# Altium PCB PCB1.PcbDoc
Units mm, origin at the board's own origin, x right, y up, seen from the top; angles counter-clockwise.
Board outline 29.34 x 38.73 mm, 2 copper layers (Top Layer, Bottom Layer); 15 components, 0 nets, 47 pads, 0 vias.
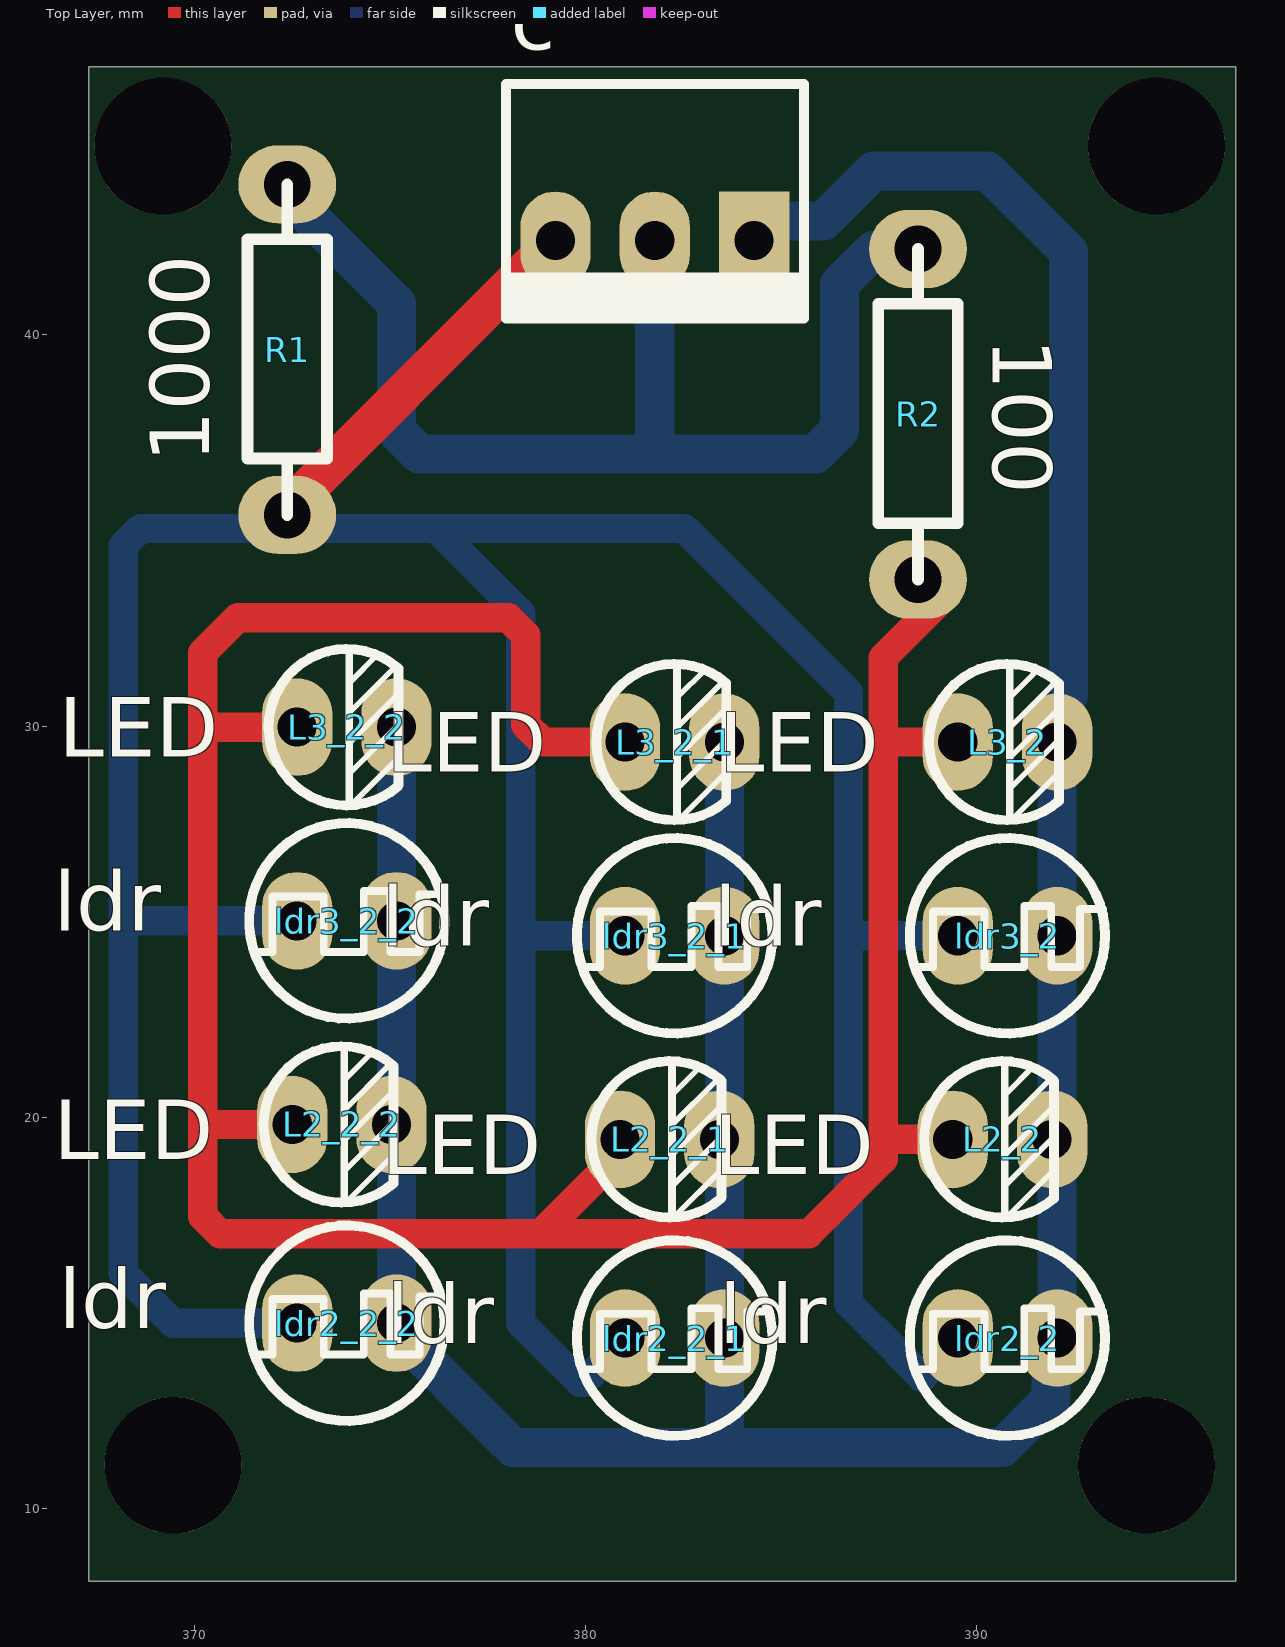
[diagram p0: Top Layer view]
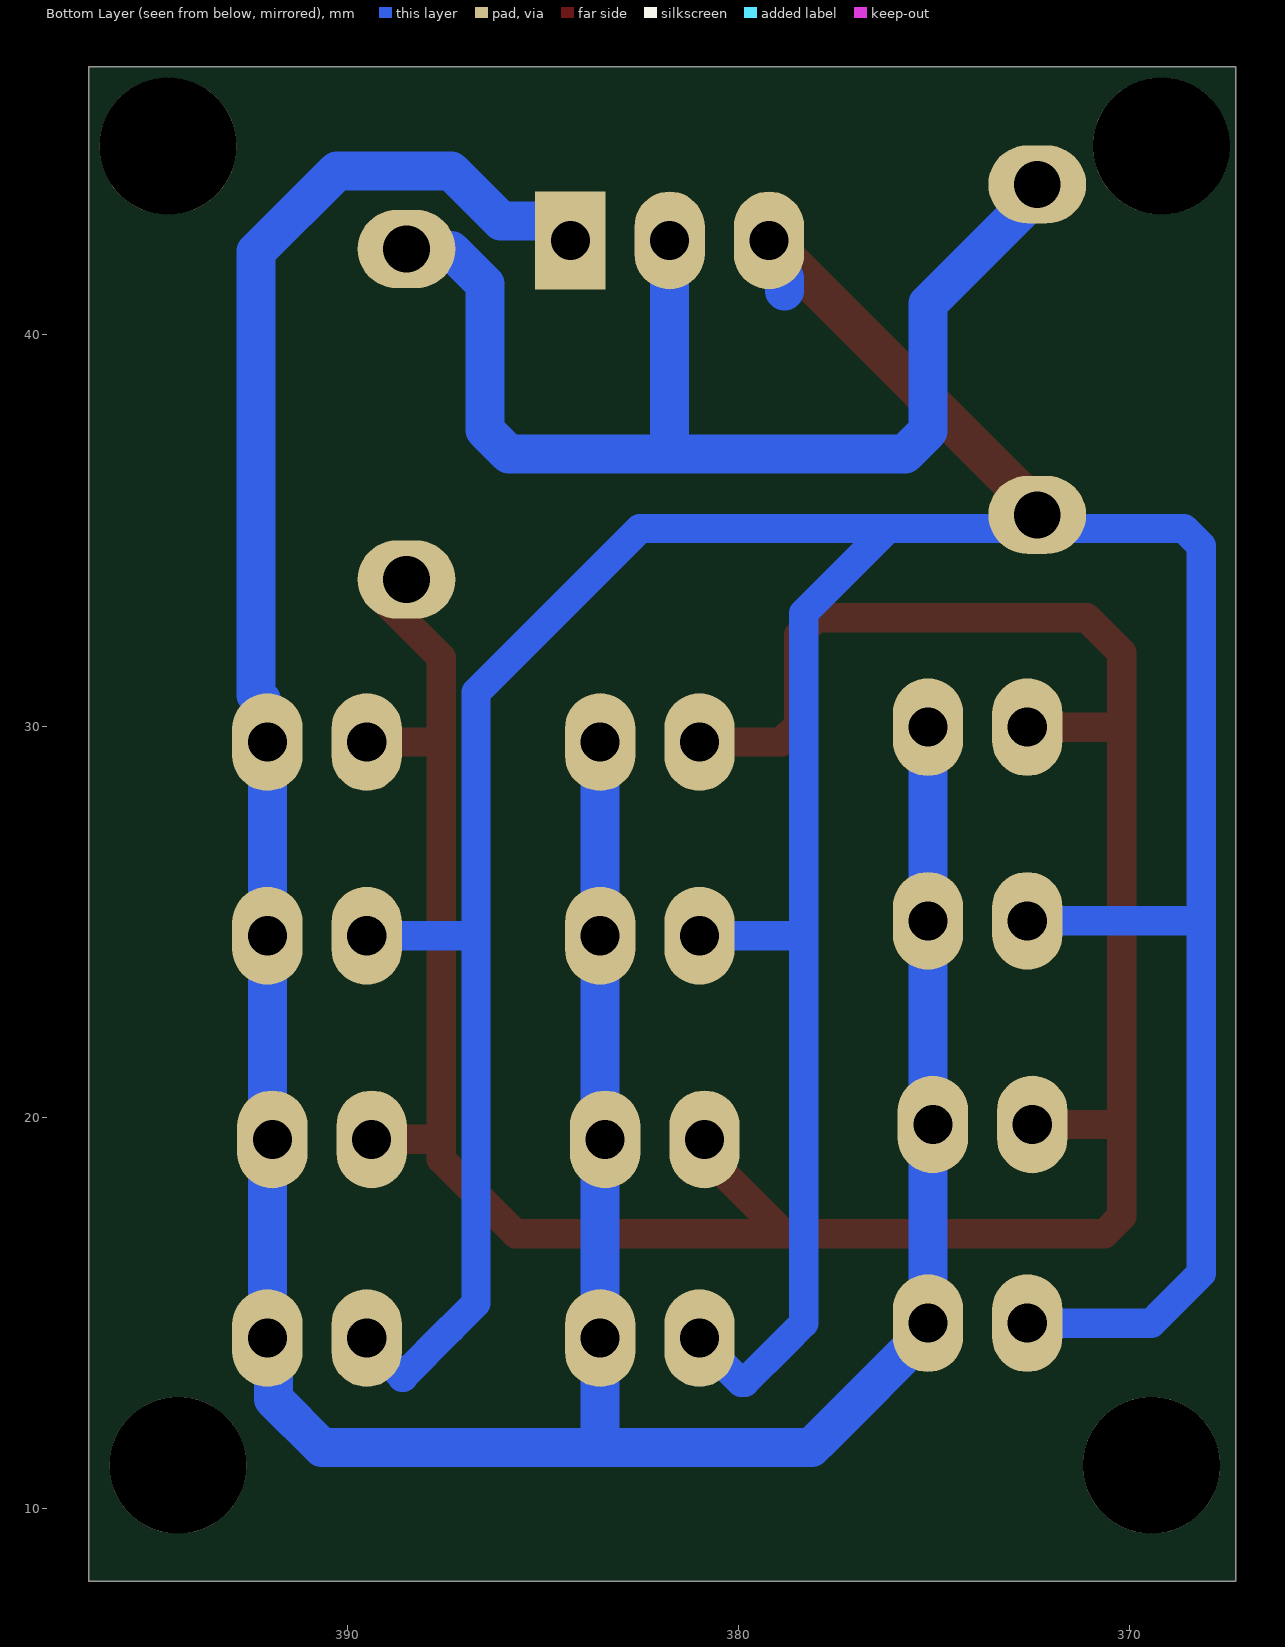
[diagram p1: Bottom Layer view, seen from below]

## Layer stack, top to bottom
Top Solder: solder mask 0.0102, Solder Resist, Dk 3.5
Top Layer: signal copper 0.0356
Dielectric 1: dielectric 0.32, FR-4, Dk 4.8
Bottom Layer: signal copper 0.0356
Bottom Solder: solder mask 0.0102, Solder Resist, Dk 3.5

## Board outline
367.284,8.128 367.284,46.863 396.621,46.863 396.621,8.128

## Design rules (kind name [scope] priority, off if disabled: settings)
Clearance [All] p1: gap=0.254 ignorepadtopadclearanceinfootprint=FALSE
PolygonConnect [All] p1: connectstyle=Relief reliefconductorwidth=0.254 reliefentries=4 polygonreliefangle="90 Angle" airgapwidth=0.254
RoutingVias [All] p1: holewidth=0.711 width=1.27 viastyle="Through Hole" minholewidth=0.711 minwidth=1.27 maxholewidth=0.711 maxwidth=1.27
SolderMaskExpansion [All] p1: expansion=0.102 istentingtop=FALSE
Width [All] p1: maxlimit=1 minlimit=0.75 preferedwidth=0.75
30 further rules are at their usual default settings.

## Components (designator, comment, footprint, x,y, rotation, side; value= is the part's Value field where it differs from the comment)
c "Header 3" mokhaberati3 384.302,42.418 r180 top (schematic designator H1)
L2_2 "LED" LED_3 390.652,19.431 r0 top (schematic designator L2)
L2_2_1 "LED" LED_3 382.143,19.431 r0 top (schematic designator L2)
L2_2_2 "LED" LED_3 373.761,19.812 r0 top (schematic designator L2)
L3_2 "LED" LED_3 390.779,29.591 r0 top (schematic designator L3)
L3_2_1 "LED" LED_3 382.27,29.591 r0 top (schematic designator L3)
L3_2_2 "LED" LED_3 373.888,29.972 r0 top (schematic designator L3)
ldr2_2 "ldr" ldr_1 390.779,14.351 r180 top (schematic designator ldr2)
ldr2_2_1 "ldr" ldr_1 382.27,14.351 r180 top (schematic designator ldr2)
ldr2_2_2 "ldr" ldr_1 373.888,14.732 r180 top (schematic designator ldr2)
ldr3_2 "ldr" ldr_1 390.779,24.638 r180 top (schematic designator ldr3)
ldr3_2_1 "ldr" ldr_1 382.27,24.638 r180 top (schematic designator ldr3)
ldr3_2_2 "ldr" ldr_1 373.888,25.019 r180 top (schematic designator ldr3)
R1 "1000" res_1 372.364,39.624 r90 top
R2 "100" res_1 388.493,37.973 r90 top

## Footprints (in the part's own frame and the unit in brackets; to place one, negate y for a bottom-side part, rotate by r counter-clockwise, add the part's x,y. Pads: shape width x height; smd on the part's side, far side on the other; paste and mask are expansions set on the pad)
ldr_1 [mm]
  oval 1.8x2.5 hole 1 paste-2539.97 mask+0.102: 1(-1.27,0) 2(1.27,0)
  round 0.2 on Top Overlay: 2(0,0)
  silkscreen extent -2.5,-2.5 2.5,2.5
LED_3 [mm] "www.Pishnam.com"
  oval 1.8x2.5 hole 1: 1(-1.27,0) 2(1.27,0)
  round 0.3 on Top Overlay: 1(0,0)
  silkscreen extent -2,-2.01 1.38,2, body extent -1.88,-1.83 1.84,2.17, height 5.08
mokhaberati3 [mm]
  rect 1.8x2.5 hole 1: gnd(0,0)
  oval 1.8x2.5 hole 1: out(5.08,0) vcc(2.54,0)
  silkscreen extent -1.27,-4 6.35,2, body extent -1.27,-4 6.35,2, height 11
res_1 [mm] "www.Pishnam.com"
  oval 2x2.5 hole 1.2: 1(-4.225,0) 2(4.225,0)
  silkscreen extent -4.22,-1.02 4.23,1.02, body extent -4.54,-0.96 4.42,0.88, height 1.92

## Part data
c: "Header, 3-Pin", طراحی توسط="مهندس محمد رفیعی", وب سایت=www.Pishnam.com, کانال تلگرام=@Pishnam
R1 R2: library part Resistor, "Resistor", طراحی توسط="مهندس محمد رفیعی", وب سایت=www.Pishnam.com, کانال تلگرام=@Pishnam
L2_2 L2_2_1 L2_2_2 L3_2 L3_2_1 L3_2_2 ldr2_2 ldr2_2_1 ldr2_2_2 ldr3_2 ldr3_2_1 ldr3_2_2: طراحی توسط="مهندس محمد رفیعی", وب سایت=www.Pishnam.com, کانال تلگرام=@Pishnam

## Free pads (board coordinates)
  round 3.5 hole 3.5: 6(369.189,44.831) 6(369.443,11.099) 6(394.335,11.099) 6(394.589,44.831)

## Nets (pads, with @x,y where several pads share a name; then routed paths per layer and width w, separated by ;. In a path a pad name is that pad's centre, name@x,y a point inside that pad or via, vN(x,y) a via of type N, cw(c..) or ccw(c..) an arc to the next point about the centre after c; other vN are vias at no path point)
pads on no net: c.gnd c.out c.vcc L2_2.1 L2_2.2 L2_2_1.1 L2_2_1.2 L2_2_2.1 L2_2_2.2 L3_2.1 L3_2.2 L3_2_1.1 L3_2_1.2 L3_2_2.1 L3_2_2.2 ldr2_2.1 ldr2_2.2 ldr2_2_1.1 ldr2_2_1.2 ldr2_2_2.1 ldr2_2_2.2 ldr3_2.1 ldr3_2.2 ldr3_2_1.1 ldr3_2_1.2 ldr3_2_2.1 ldr3_2_2.2 R1.1 R1.2 R2.1 R2.2
copper on no net: | length 309.6
  Top Layer w0.75: 370.205,19.812 372.491,19.812 ; 370.244,29.972 372.618,29.972 ; 378.911,17.088 380.873,19.05 380.873,19.431 ; 381.261,29.591 378.899,29.591 378.46,30.03 378.46,32.327 378.021,32.766 371.094,32.766 370.205,31.877 370.205,29.972 370.205,17.457 370.644,17.018 378.911,17.018 385.699,17.018 387.604,18.923 387.604,19.431 ; 387.731,29.591 389.509,29.591 ; 389.173,33.319 387.604,31.75 387.604,29.591 387.604,19.431 ; 389.382,19.431 387.604,19.431
  Top Layer w1: 372.035,35.231 378.719,41.915 378.852,41.915 379.222,42.284 379.222,42.418 ; 381.762,42.164 381.762,42.418
  Bottom Layer w0.75: 372.618,14.732 369.761,14.732 369.443,14.732 368.173,16.002 368.173,25.019 ; 372.618,25.019 368.173,25.019 ; 381,14.351 381,14.285 379.935,13.22 379.845,13.22 378.841,14.224 378.333,14.732 378.333,24.638 ; 381,24.638 378.333,24.638 ; 387.35,14.605 388.608,13.347 388.571,13.347 389.509,14.285 389.509,14.351 ; 387.604,14.351 386.715,15.24 386.715,24.638 ; 389.509,24.638 386.715,24.638 ; 368.173,25.019 368.173,34.613 368.612,35.052 371.504,35.052 376.174,35.052 ; 376.174,35.052 382.524,35.052 386.715,30.861 386.715,24.638 ; 376.174,35.052 378.333,32.893 378.333,24.638
  Bottom Layer w1: 371.887,44.072 375.158,40.801 375.158,37.543 375.744,36.957 381.762,36.957 ; 375.09,14.6 377.879,11.811 378.133,11.557 383.54,11.557 383.54,14.351 ; 375.158,14.532 375.158,19.812 375.158,25.019 375.158,29.972 ; 375.285,30.422 375.285,30.51 ; 378.822,41.129 378.822,41.452 379.222,41.852 379.222,42.418 ; 381.635,11.557 390.657,11.557 391.896,12.796 391.896,14.198 392.049,14.351 ; 381.762,42.418 381.762,36.957 ; 383.54,14.217 383.54,14.351 ; 383.54,30.129 383.54,29.591 383.54,24.638 383.54,19.431 383.54,14.351 ; 384.302,42.418 384.302,42.519 384.702,42.919 386.073,42.919 387.35,44.196 390.271,44.196 392.337,42.13 392.337,30.795 392.202,30.66 392.202,30.014 392.337,29.879 ; 388.747,42.164 387.35,42.164 386.489,41.303 386.489,37.571 385.875,36.957 381.762,36.957 ; 392.049,14.151 392.049,19.431 392.049,24.638 392.049,29.591

## Silkscreen, mask and mechanical layers (free items; w line width, h text height)
Mechanical 1:
  the board outline again, w0.254